# Altium PCB ultrazohm_digital_voltage_3U_1vxx.PcbDoc (part 2 of 4)
Units mm, origin at the board's own origin, x right, y up, seen from the top; angles counter-clockwise.
Board outline 155.99 x 100 mm, 4 copper layers (Top Layer, Layer 1, Layer 2, Bottom Layer), stack 0.98 mm thick; 148 components, 295 nets, 1106 pads, 423 vias.
Unrouted connection lines stored in the file: 171.
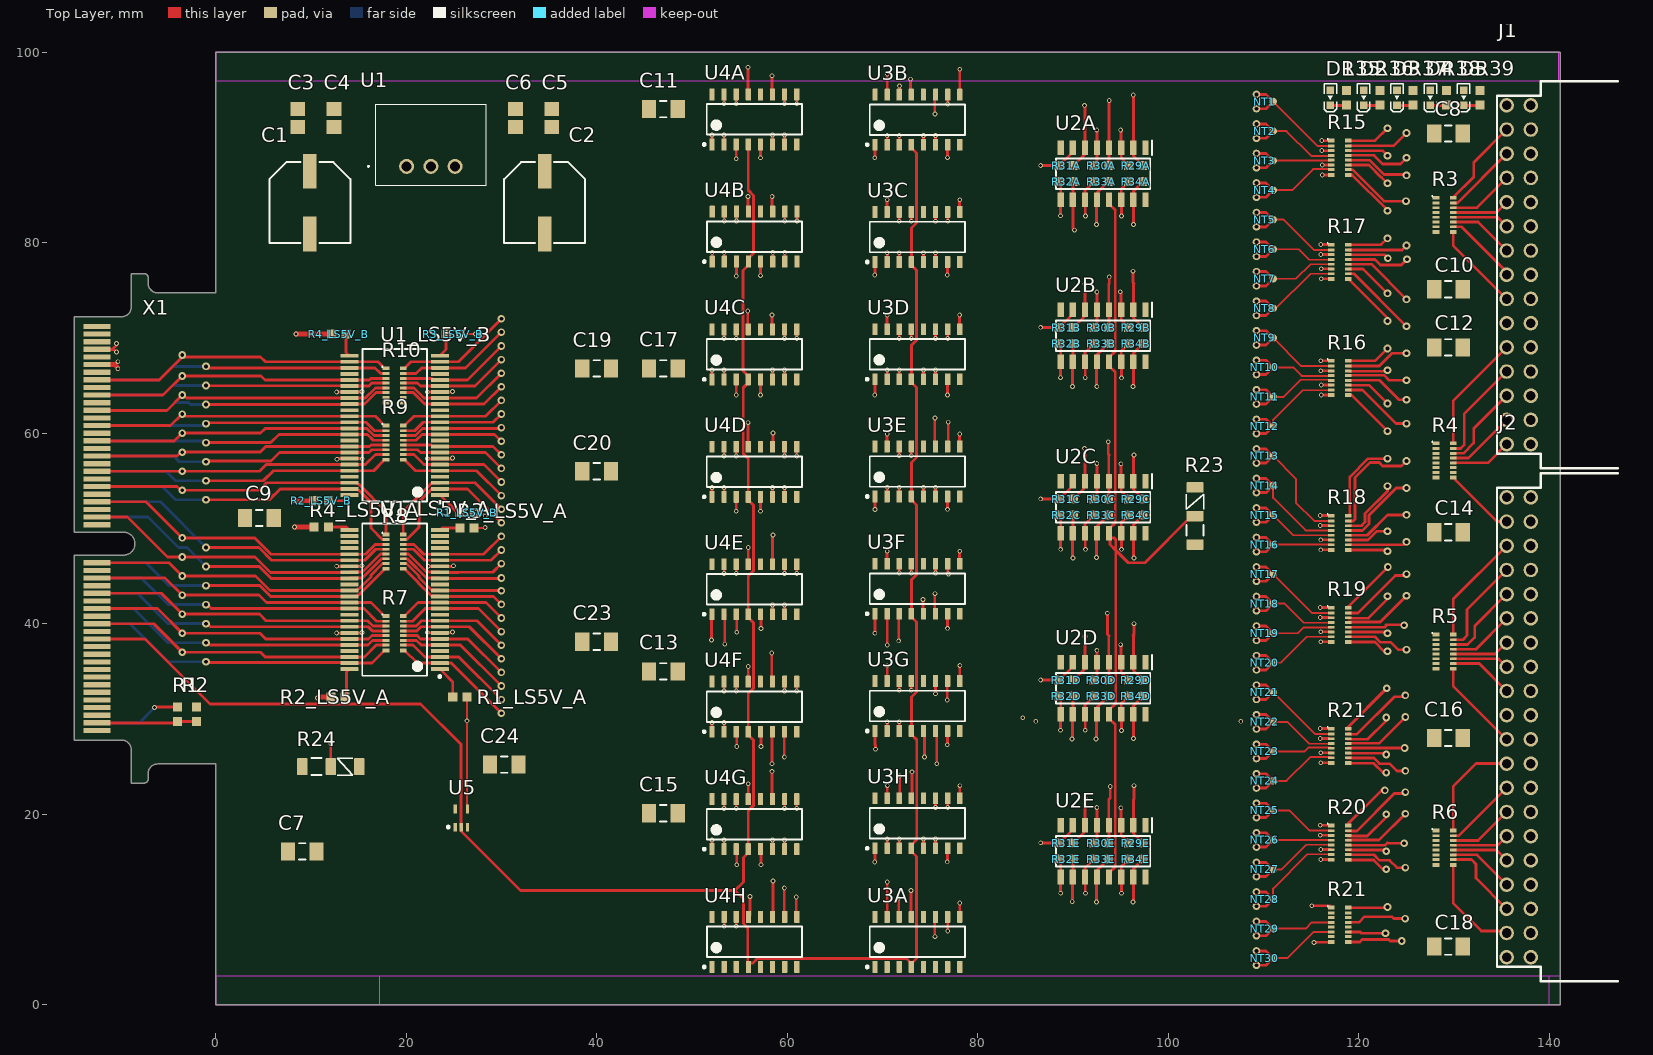
[diagram p0: Top Layer view]

## Part data (continued)
U3A U3B U3C U3D U3E U3F U3G U3H: "CMOS Quad Tri-State Differential Line Drivers, 16-pin Narrow SOIC, Pb-Free", Max Voltage=5.5, MPN1=DS26C31TM/NOPB, Package=CurrentFootprint, ComponentLink1Description=Datasheet, ComponentLink1URL=http://www.ti.com/general/docs/lit/getliterature.tsp?genericPartNumber=DS26C31T&fileType=pdf, created=2019-12-16_Thilo_Wendt, HelpURL=http://www.ti.com/general/docs/lit/getliterature.tsp?genericPartNumber=DS26C31T&fileType=pdf, MF1="Texas Instruments", SPN1=1468967, Supplier1=Farnell
U4A U4B U4C U4D U4E U4F U4G U4H: "3V Enhanced CMOS Quad Differential Line Receiver, 16-pin Narrow SOIC, Pb-Free", Max Voltage=3.6, Package=CurrentFootprint, ComponentLink1Description=Datasheet, ComponentLink1URL=http://www.ti.com/general/docs/lit/getliterature.tsp?genericPartNumber=DS26LV32AT&fileType=pdf, created=2020-01-03_Thilo_Wendt, HelpURL=http://www.ti.com/general/docs/lit/getliterature.tsp?genericPartNumber=DS26LV32AT&fileType=pdf, MF1="Texas Instruments", MPN1=DS26LV32ATM, SPN1=1468999, Supplier1=Farnell
U5: library part 74AHCX1G14-5, "Inverting Schmitt trigger for 2 V to 5.5 V", Manufacturer=Nexperia, Supplier Part Number 1=1727-3149-2-ND, ComponentLink1Description=Datasheet, ComponentLink1URL=https://www.mouser.de/datasheet/2/916/74AHC_AHCT1G14-1319577.pdf, created=2018_09_06_AGeiger, Supplier 1=Digi-Key, Supplier 2=Mouser, Supplier 3=Farnell, Supplier Part Number 2=771-74AHC1G14GW-G, Supplier Part Number 3=2336684
X1: "Mating Card Layout for HSEC8-150-01-XX-DV-A-BL", Manufacturer=SAMTEC, created=2018_04_23_AGeiger
NT1 NT2 NT3 NT4 NT5 NT6 NT7 NT8 NT9 NT10 NT11 NT12 NT13 NT14 NT15 NT16 NT17 NT18 NT19 NT20 NT21 NT22 NT23 NT24 NT25 NT26 NT27 NT28 NT29 NT30: created=2020-01-03_Thilo_Wendt

## Via types
v1: diameter 0.5, hole 0.3, Top Layer to Bottom Layer, 244 vias
v2: diameter 0.8, hole 0.4, Top Layer to Bottom Layer, 120 vias
v3: diameter 0.5/0.5/0.5/0.5 (per signal layer), hole 0.3, Top Layer to Bottom Layer, 59 vias

## Nets (pads, with @x,y where several pads share a name; then routed paths per layer and width w, separated by ;. In a path a pad name is that pad's centre, name@x,y a point inside that pad or via, vN(x,y) a via of type N, cw(c..) or ccw(c..) an arc to the next point about the centre after c; other vN are vias at no path point)
1A1A: R7.8 U1_LS5V_A.47 X1.72 | length 32.6
  Top Layer w0.3: v2(-1,36) -0.912,35.913 13.996,35.913 U1_LS5V_A.47@14.046,35.863 16.408,35.863 17.746,37.2 R7.8@17.896,37.2
  Bottom Layer w0.3: X1.72@-12.44,39.991 -8.991,39.991 -5,36 v2(-1,36)
1A1B: R8.2 U1_LS5V_B.47 X1.44 | length 35.2
  Top Layer w0.3: v2(-1,53) 5.646,53 6.797,54.151 U1_LS5V_B.47@14.058,54.151 14.808,54.151 14.993,53.966 15.082,53.966 16.312,52.735 16.312,50.047 17.542,48.817 R8.2@17.896,48.817
  Bottom Layer w0.3: X1.44@-12.44,54.391 -5.591,54.391 -4.2,53 v2(-1,53)
1A2A: R7.7 U1_LS5V_A.46 X1.71 | length 32.3
  Top Layer w0.3: X1.71@-12.44,39.991 -6.491,39.991 v2(-3.5,37) 4.714,37 5.217,36.498 U1_LS5V_A.46@14.046,36.498 15.62,36.498 16.872,37.75 R7.7@17.896,37.75
1A2B: R8.1 U1_LS5V_B.46 X1.43 | length 34.5
  Top Layer w0.3: X1.43@-12.44,54.391 -4.026,54.391 -3.635,54 v2(-3.5,54) 4.579,54 5.364,54.786 U1_LS5V_B.46@14.058,54.786 14.808,54.786 14.993,54.601 15.082,54.601 17.896,51.787 R8.1@17.896,49.367
1A3A: R7.6 U1_LS5V_A.44 X1.68 | length 32.1
  Top Layer w0.3: v2(-1,38) -0.865,38 -0.632,37.768 U1_LS5V_A.44@14.046,37.768 16.005,37.768 16.487,38.25 R7.6@17.896,38.25
  Bottom Layer w0.3: X1.68@-12.44,41.591 -8.591,41.591 -5,38 v2(-1,38)
1A3B: R9.8 U1_LS5V_B.44 X1.40 | length 31.7
  Top Layer w0.3: v2(-1,55) 5.013,55 6.069,56.056 U1_LS5V_B.44@14.058,56.056 16.602,56.056 17.746,57.2 R9.8@17.896,57.2
  Bottom Layer w0.3: X1.40@-12.44,55.991 -5.191,55.991 -4.2,55 v2(-1,55)
1A4A: R7.5 U1_LS5V_A.43 X1.67 | length 31.8
  Top Layer w0.3: X1.67@-12.44,41.591 -6.091,41.591 v2(-3.5,39) 4.667,39 5.264,38.403 U1_LS5V_A.43@14.046,38.403 16.072,38.403 16.42,38.75 R7.5@17.896,38.75
1A4B: R9.7 U1_LS5V_B.43 X1.39 | length 31.1
  Top Layer w0.3: X1.39@-12.44,55.991 -12.435,55.996 -3.505,55.996 v2(-3.5,56) 4.626,56 5.317,56.691 U1_LS5V_B.43@14.058,56.691 15.722,56.691 16.782,57.75 R9.7@17.896,57.75
1A5A: R7.4 U1_LS5V_A.41 X1.64 | length 32
  Top Layer w0.3: v2(-1,40) -0.865,40 -0.537,39.673 U1_LS5V_A.41@14.046,39.673 16.035,39.673 16.457,39.25 R7.4@17.896,39.25
  Bottom Layer w0.3: X1.64@-12.44,43.191 -8.191,43.191 -5,40 v2(-1,40)
1A5B: R9.6 U1_LS5V_B.41 X1.36 | length 31.1
  Top Layer w0.3: v2(-1,57) -0.909,57.091 5.832,57.091 6.702,57.961 U1_LS5V_B.41@14.058,57.961 16.107,57.961 16.397,58.25 R9.6@17.896,58.25
  Bottom Layer w0.3: X1.36@-12.44,57.591 -4.391,57.591 -3.8,57 v2(-1,57)
1A6A: R7.3 U1_LS5V_A.40 X1.63 | length 31.8
  Top Layer w0.3: X1.63@-12.44,43.191 -5.691,43.191 v2(-3.5,41) 4.619,41 5.312,40.308 U1_LS5V_A.40@14.046,40.308 15.967,40.308 16.525,39.75 R7.3@17.896,39.75
1A6B: R9.5 U1_LS5V_B.40 X1.35 | length 30.8
  Top Layer w0.3: X1.35@-12.44,57.591 -4.044,57.591 -3.635,58 v2(-3.5,58) 4.674,58 5.269,58.596 U1_LS5V_B.40@14.058,58.596 16.175,58.596 16.329,58.75 R9.5@17.896,58.75
1A7A: R7.2 U1_LS5V_A.38 X1.60 | length 32.2
  Top Layer w0.3: v2(-1,42) -0.865,42 -0.442,41.578 U1_LS5V_A.38@14.046,41.578 15.582,41.578 16.91,40.25 R7.2@17.896,40.25
  Bottom Layer w0.3: X1.60@-12.44,44.791 -7.791,44.791 -5,42 v2(-1,42)
1A7B: R9.4 U1_LS5V_B.38 X1.32 | length 31
  Top Layer w0.3: v2(-1,59) 5.789,59 6.654,59.866 U1_LS5V_B.38@14.058,59.866 15.944,59.866 16.56,59.25 R9.4@17.896,59.25
  Bottom Layer w0.3: X1.32@-12.44,59.191 -1.191,59.191 v2(-1,59)
1A8A: R7.1 U1_LS5V_A.37 X1.59 | length 32
  Top Layer w0.3: X1.59@-12.44,44.791 -5.291,44.791 v2(-3.5,43) 4.572,43 5.359,42.213 U1_LS5V_A.37@14.046,42.213 16.333,42.213 17.746,40.8 R7.1@17.896,40.8
1A8B: R9.3 U1_LS5V_B.37 X1.31 | length 31.2
  Top Layer w0.3: X1.31@-12.44,59.191 -4.309,59.191 v2(-3.5,60) 4.721,60 5.222,60.501 U1_LS5V_B.37@14.058,60.501 15.877,60.501 16.627,59.75 R9.3@17.896,59.75